# Altium PCB PCB1.PcbDoc
Units mil, origin at the board's own origin, x right, y up, seen from the top; angles counter-clockwise.
Board outline 6000 x 4000 mil, 2 copper layers (Top Layer, Bottom Layer); 73 components, 67 nets, 275 pads, 0 vias.
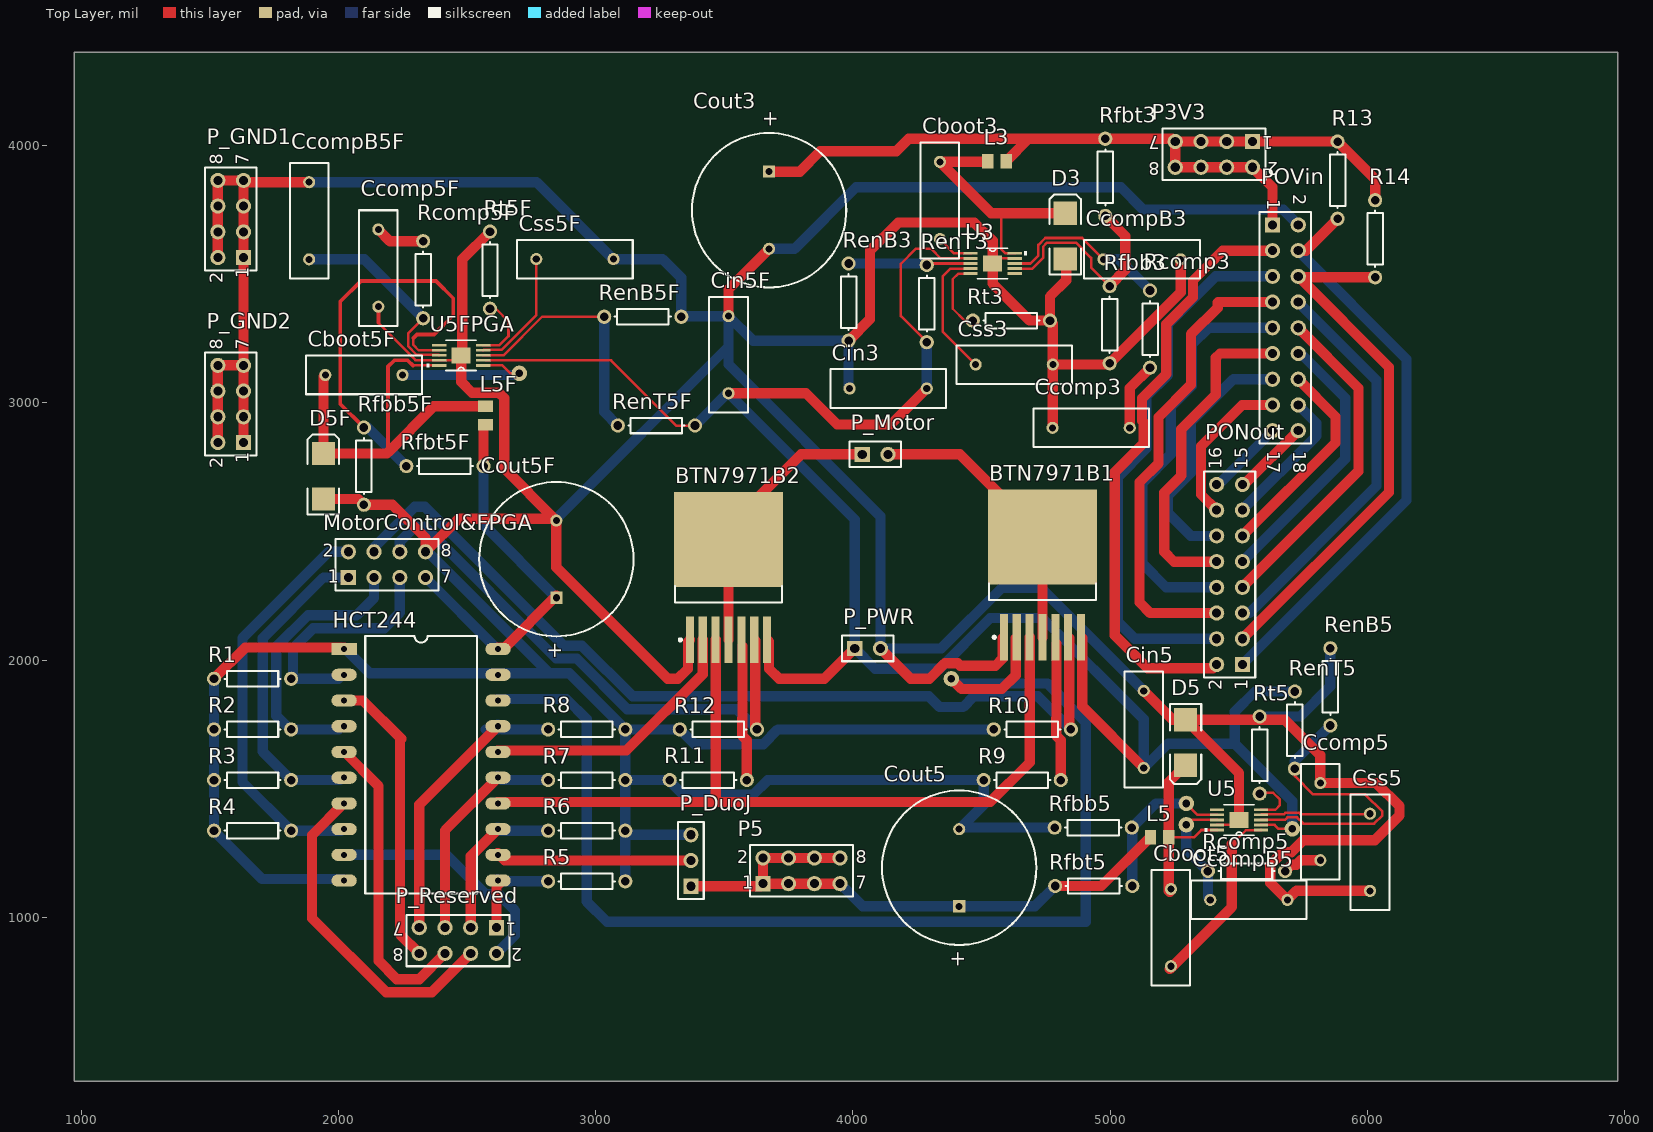
[diagram p0: Top Layer view]
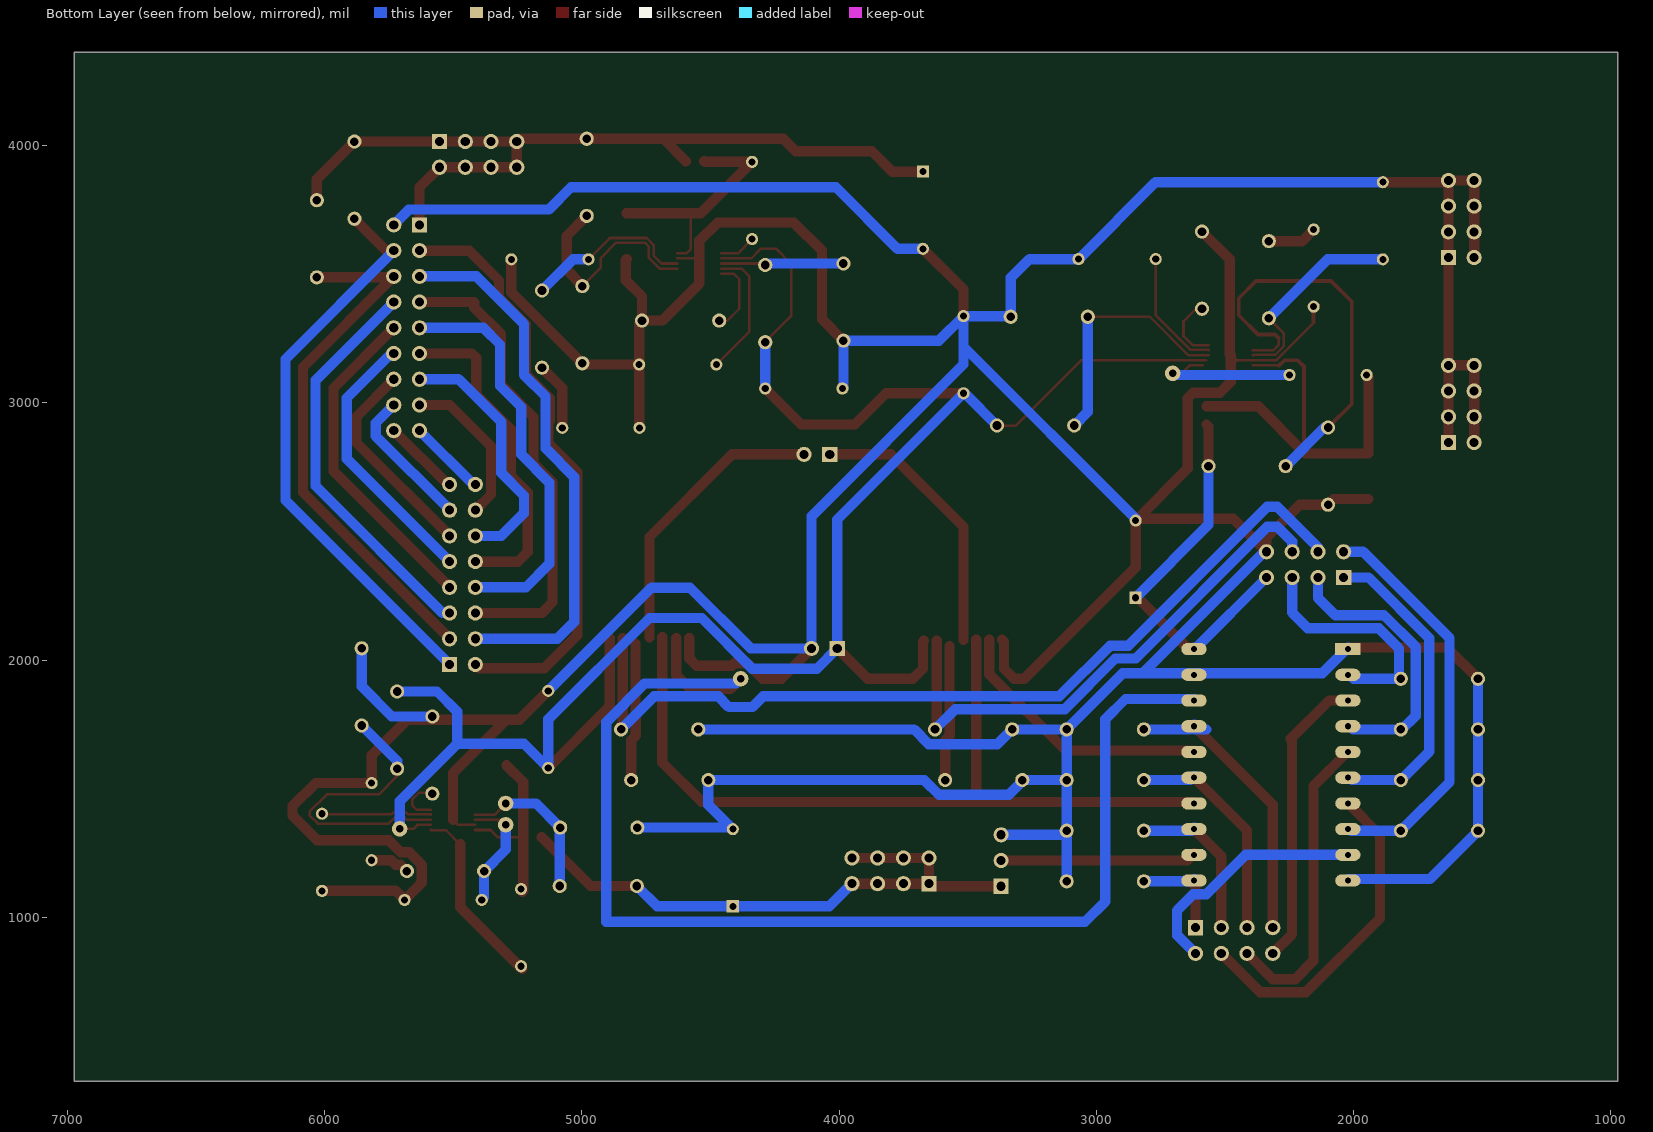
[diagram p1: Bottom Layer view, seen from below]

## Layer stack, top to bottom
Top Solder: solder mask 0.4, Solder Resist, Dk 3.5
Top Layer: signal copper 1.4
Dielectric 1: dielectric 12.6, FR-4, Dk 4.8
Bottom Layer: signal copper 1.4
Bottom Solder: solder mask 0.4, Solder Resist, Dk 3.5

## Board outline
973,363 6973,363 6973,4363 973,4363

## Design rules (kind name [scope] priority, off if disabled: settings)
Clearance [All] p1: gap=10 ignorepadtopadclearanceinfootprint=TRUE except(0: Arc-Hole Track-Hole SMDPad-Hole THPad-Hole Via-Hole Fill-Hole Poly-Hole Region-Hole Text-Hole; 5: Arc-SMDPad Track-SMDPad SMDPad-SMDPad; 8: Arc-Arc Arc-Track Track-Track)
PolygonConnect [All] p1: connectstyle=Relief reliefconductorwidth=10 reliefentries=4 polygonreliefangle="90 Angle" airgapwidth=10
RoutingVias [All] p1: holewidth=28 width=50 viastyle="Through Hole" minholewidth=28 minwidth=50 maxholewidth=28 maxwidth=50
SolderMaskExpansion [All] p1: expansion=4
Width [All] p1: maxlimit=150 minlimit=10 preferedwidth=40 minimp=50.000000 maximp=50.000000 favimp=50.000000
30 further rules are at their usual default settings.

## Components (designator, comment, footprint, x,y, rotation, side; value= is the part's Value field where it differs from the comment)
BTN7971B1 "BTN" BTN7971B 4736.78,2331.08 r90 top
BTN7971B2 "BTN" BTN7971B 3516.31,2321.24 r90 top
Cboot3 "Cap" RAD-0.3 4338,3787 r90 top value=100pF
Cboot5 "Cap" RAD-0.3 5236,960 r90 top value=100pF
Cboot5F "Cap" RAD-0.3 2098.98,3108.64 r180 top value=100pF
Ccomp3 "Cap" RAD-0.3 4926,2903 r180 top value=100pF
Ccomp5 "Cap" RAD-0.3 5817,1372 r90 top value=100pF
Ccomp5F "Cap" RAD-0.3 2155,3524 r270 top value=100pF
CcompB3 "Cap" RAD-0.3 5124,3558 r180 top value=100pF
CcompB5 "Cap" RAD-0.3 5539,1068 r180 top value=100pF
CcompB5F "Cap" RAD-0.3 1886,3708 r270 top value=100pF
Cin3 "Cap" RAD-0.3 4137,3056 r0 top value=100pF
Cin5 "Cap" RAD-0.3 5130.48,1730.68 r270 top value=100pF
Cin5F "Cap" RAD-0.3 3516.31,3187.38 r270 top value=100pF
Cout3 "Cap Pol1" RB7.6-15 3674,3749 r90 top value=100pF
Cout5 "Cap Pol1" RB7.6-15 4413,1193 r270 top value=100pF
Cout5F "Cap Pol1" RB7.6-15 2847.02,2392.5 r270 top value=100pF
Css3 "Cap" RAD-0.3 4627,3149 r180 top value=100pF
Css5 "Cap" RAD-0.3 6010,1253 r90 top value=100pF
Css5F "Cap" RAD-0.3 2919,3559 r180 top value=100pF
D3 "D Schottky" SMB 4825,3648.42 r90 top
D5 "D Schottky" SMB 5293,1680 r270 top
D5F "D Schottky" SMB 1941.5,2714.94 r90 top
HCT244 "HCT244" DIP20 2022,2043 r0 top
L3 "Inductor" 0805 4560,3940 r180 top value=10mH
L5 "Inductor" 0805 5192.5,1311 r0 top value=10mH
L5F "Inductor" 0805 2571.43,2951.16 r90 top value=10mH
MotorControl&FPGA "Header 4X2" HDR2X4 2038.35,2321.24 r0 top
P3V3 "Header 4X2" HDR2X4 5553,4016 r180 top
P5 "Header 4X2" HDR2X4 3650,1131 r0 top
P_DuoJ "Header 3" HDR1X3 3370,1121 r90 top
P_GND1 "Header 4X2" HDR2X4 1631,3565 r90 top
P_GND2 "Header 4X2" HDR2X4 1631,2846 r90 top
P_Motor "Header 2" HDR1X2 4036,2800 r0 top
P_PWR "Header 2" HDR1X2 4006.86,2045.65 r0 top
P_Reserved "Header 4X2" HDR2X4 2614,960 r180 top
PONout "Header 8X2" HDR2X8 5514,1983 r90 top
POVin "Header 9X2" HDR2X9 5631,3692 r270 top
R1 "Res1" AXIAL-0.3 1665.91,1927.54 r0 top value=1K
R2 "Res1" AXIAL-0.3 1665.91,1730.69 r0 top value=1K
R3 "Res1" AXIAL-0.3 1665.91,1533.83 r0 top value=1K
R4 "Res1" AXIAL-0.3 1665.91,1336.98 r0 top value=1K
R5 "Res1" AXIAL-0.3 2965.13,1140.13 r180 top value=1K
R6 "Res1" AXIAL-0.3 2965.13,1336.98 r180 top value=1K
R7 "Res1" AXIAL-0.3 2965.13,1533.83 r180 top value=1K
R8 "Res1" AXIAL-0.3 2965.13,1730.69 r180 top value=1K
R9 "Res1" AXIAL-0.3 4658.04,1533.83 r0 top value=1K
R10 "Res1" AXIAL-0.3 4697.41,1730.69 r180 top value=1K
R11 "Res1" AXIAL-0.3 3437.57,1533.83 r0 top value=1K
R12 "Res1" AXIAL-0.3 3476.94,1730.69 r180 top value=1K
R13 "Res1" AXIAL-0.3 5884,3866 r90 top value=1K
R14 "Res1" AXIAL-0.3 6030,3638 r90 top value=1K
Rcomp3 "Res1" AXIAL-0.3 5155,3287 r270 top value=1K
Rcomp5 "Res1" AXIAL-0.3 5530,1180 r0 top value=1K
Rcomp5F "Res1" AXIAL-0.3 2329,3479 r90 top value=1K
RenB3 "Res1" AXIAL-0.3 3983,3392 r90 top value=1K
RenB5 "Res1" AXIAL-0.3 5856,1896 r270 top value=1K
RenB5F "Res1" AXIAL-0.3 3183,3335 r180 top value=1K
RenT3 "Res1" AXIAL-0.3 4287,3386 r270 top value=1K
RenT5 "Res1" AXIAL-0.3 5718,1728 r90 top value=1K
RenT5F "Res1" AXIAL-0.3 3236,2912 r0 top value=1K
Rfbb3 "Res1" AXIAL-0.3 4998,3304 r90 top value=1K
Rfbb5 "Res1" AXIAL-0.3 4934,1349 r0 top value=1K
Rfbb5F "Res1" AXIAL-0.3 2098.98,2754.31 r90 top value=1K
Rfbt3 "Res1" AXIAL-0.3 4981,3877 r90 top value=1K
Rfbt5 "Res1" AXIAL-0.3 4936,1122 r180 top value=1K
Rfbt5F "Res1" AXIAL-0.3 2413.94,2754.31 r0 top value=1K
Rt3 "Res1" AXIAL-0.3 4616,3320 r180 top value=1K
Rt5 "Res1" AXIAL-0.3 5581,1631 r270 top value=1K
Rt5F "Res1" AXIAL-0.3 2589,3516 r270 top value=1K
U3 "TPS54160DGQR" S-PDSO-G10 4543,3542 r0 top value=Value
U5 "TPS54160DGQR" S-PDSO-G10 5501,1379 r180 top value=Value
U5FPGA "TPS54160DGQR" S-PDSO-G10 2477,3185 r180 top value=Value

## Footprints (in the part's own frame and the unit in brackets; to place one, negate y for a bottom-side part, rotate by r counter-clockwise, add the part's x,y. Pads: shape width x height; smd on the part's side, far side on the other; paste and mask are expansions set on the pad)
0805 [mil]
  rect 44x57 smd: 1(-35.5,0) 2(35.5,0)
AXIAL-0.3 [mm] "Axial Device, Thru-Hole; 2 Leads; 0.3 in Pin Spacing"
  round 1.4 hole 0.85: 1(-3.81,0) 2(3.81,0)
  silkscreen extent -2.77,-0.76 2.77,0.76
BTN7971B [mm]
  rect 4.6x0.8 smd: 1(-6.15,3.81) 2(-6.15,2.54) 3(-6.15,1.27) 4(-6.15,0) 5(-6.15,-1.27) 6(-6.15,-2.54) 7(-6.15,-3.81)
  rect 9.4x10.8 smd: 8(3.75,0)
  silkscreen extent -6.27,-5.3 -0.85,5.3
DIP20 [mm]
  rect 2.5x1.2 hole 0.6: 1(0,0)
  oval 2.5x1.2 hole 0.6: 2(0,-2.54) 3(0,-5.08) 4(0,-7.62) 5(0,-10.16) 6(0,-12.7) 7(0,-15.24) 8(0,-17.78) 9(0,-20.32) 10(0,-22.86) 11(15.2,-22.86) 12(15.2,-20.32) 13(15.2,-17.78) 14(15.2,-15.24) 15(15.2,-12.7) 16(15.2,-10.16) 17(15.2,-7.62) 18(15.2,-5.08) 19(15.2,-2.54) 20(15.2,0)
  silkscreen extent 2.08,-24.13 13.11,1.27
HDR1X2 [mm] "Connector; Header; 2 Position"
  rect 1.5x1.5 hole 0.9: 1(0,0)
  round 1.5 hole 0.9: 2(2.54,0)
  silkscreen extent -1.27,-1.27 3.81,1.27
HDR1X3 [mm] "Connector; Header; 3 Position"
  rect 1.5x1.5 hole 0.9: 1(0,0)
  round 1.5 hole 0.9: 2(2.54,0) 3(5.08,0)
  silkscreen extent -1.27,-1.27 6.35,1.27
HDR2X4 [mm] "Connector; Header; 4x2 Position"
  rect 1.5x1.5 hole 0.9: 1(0,0)
  round 1.5 hole 0.9: 2(0,2.54) 3(2.54,0) 4(2.54,2.54) 5(5.08,0) 6(5.08,2.54) 7(7.62,0) 8(7.62,2.54)
  silkscreen extent -1.27,-1.27 8.89,3.81
HDR2X8 [mm] "Connector; Header; 8x2 Position"
  rect 1.5x1.5 hole 0.9: 1(0,0)
  round 1.5 hole 0.9: 2(0,2.54) 3(2.54,0) 4(2.54,2.54) 5(5.08,0) 6(5.08,2.54) 7(7.62,0) 8(7.62,2.54) 9(10.16,0) 10(10.16,2.54) 11(12.7,0) 12(12.7,2.54) 13(15.24,0) 14(15.24,2.54) 15(17.78,0) 16(17.78,2.54)
  silkscreen extent -1.27,-1.27 19.05,3.81
HDR2X9 [mm] "Connector; Header; 9x2 Position"
  rect 1.5x1.5 hole 0.9: 1(0,0)
  round 1.5 hole 0.9: 2(0,2.54) 3(2.54,0) 4(2.54,2.54) 5(5.08,0) 6(5.08,2.54) 7(7.62,0) 8(7.62,2.54) 9(10.16,0) 10(10.16,2.54) 11(12.7,0) 12(12.7,2.54) 13(15.24,0) 14(15.24,2.54) 15(17.78,0) 16(17.78,2.54) 17(20.32,0) 18(20.32,2.54)
  silkscreen extent -1.27,-1.27 21.59,3.81
RAD-0.3 [mm] "Radial Cap, Thru-Hole; 2 Leads; 0.3 in Pin Spacing"
  round 1.2 hole 0.7: 1(-3.81,0) 2(3.81,0)
  silkscreen extent -5.71,-1.91 5.71,1.91
RB7.6-15 [mm] "Polarized Capacitor (Radial); 2 Leads"
  rect 1.2x1.2 hole 0.7: 1(3.81,0)
  round 1.2 hole 0.7: 2(-3.81,0)
  silkscreen extent -7.62,-7.62 7.62,7.62
S-PDSO-G10 [mm]
  rect 1.411x0.27 smd: 1(-2.175,1) 2(-2.175,0.5) 3(-2.175,0) 4(-2.175,-0.5) 5(-2.175,-1) 6(2.175,-1) 7(2.175,-0.5) 8(2.175,0) 9(2.175,0.5) 10(2.175,1)
  rect 1.88x1.57 smd paste-0.927: 11(0,0)
  silkscreen extent -1.5,-1.5 3.39,1.5
SMB [mm] "DO-214-AA/SMB; 2 C-Bend Leads; Body 5.3 x 3.6 mm, inc. leads (LxW)"
  rect 2.3x2.3 smd: 1(-2.25,0) 2(2.25,0)
  silkscreen extent -3.8,-1.55 4.1,1.55

## Part data
Cboot3 Cboot5 Cboot5F Ccomp3 Ccomp5 Ccomp5F CcompB3 CcompB5 CcompB5F Cin3 Cin5 Cin5F Css3 Css5 Css5F: "Capacitor", LatestRevisionDate=17-Jul-2002, LatestRevisionNote="Re-released for DXP Platform.", PackageDescription="Radial Cap, Thru-Hole; 2 Leads; 0.3 in Pin Spacing", PackageReference=RAD-0.3, Published=8-Jun-2000, Publisher="Altium Limited"
Cout3 Cout5 Cout5F: "Polarized Capacitor (Radial)", LatestRevisionDate=17-Jul-2002, LatestRevisionNote="Re-released for DXP Platform.", PackageDescription="Polarized Capacitor (Radial); 2 Leads", PackageReference=RB7.6-15, Published=8-Jun-2000, Publisher="Altium Limited"
D3 D5 D5F: "Schottky Diode", Code_JEDEC=DO-214-AA, LatestRevisionDate=17-Jul-2002, LatestRevisionNote="Re-released for DXP Platform.", PackageDescription="DO-214-AA/SMB; 2 C-Bend Leads; Body 5.3 x 3.6 mm, inc. leads (LxW)", PackageReference=SMB, Published=8-Jun-2000, Publisher="Altium Limited"
MotorControl&FPGA P3V3 P5 P_GND1 P_GND2 P_Reserved: "Header, 4-Pin, Dual row", LatestRevisionDate=17-Jul-2002, LatestRevisionNote="Re-released for DXP Platform.", Publisher="Altium Limited"
P_DuoJ: "Header, 3-Pin", LatestRevisionDate=17-Jul-2002, LatestRevisionNote="Re-released for DXP Platform.", Publisher="Altium Limited"
P_Motor P_PWR: "Header, 2-Pin", LatestRevisionDate=17-Jul-2002, LatestRevisionNote="Re-released for DXP Platform.", Publisher="Altium Limited"
PONout: "Header, 8-Pin, Dual row", LatestRevisionDate=17-Jul-2002, LatestRevisionNote="Re-released for DXP Platform.", Publisher="Altium Limited"
POVin: "Header, 9-Pin, Dual row", LatestRevisionDate=17-Jul-2002, LatestRevisionNote="Re-released for DXP Platform.", Publisher="Altium Limited"
R1 R2 R3 R4 R5 R6 R7 R8 R9 R10 R11 R12 R13 R14 Rcomp3 Rcomp5 Rcomp5F RenB3 RenB5 RenB5F RenT3 RenT5 RenT5F Rfbb3 Rfbb5 Rfbb5F Rfbt3 Rfbt5 Rfbt5F Rt3 Rt5 Rt5F: "Resistor", LatestRevisionDate=17-Jul-2002, LatestRevisionNote="Re-released for DXP Platform.", PackageDescription="Axial Device, Thru-Hole; 2 Leads; 0.3 in Pin Spacing", PackageReference=AXIAL-0.3, Published=8-Jun-2000, Publisher="Altium Limited"
U3 U5 U5FPGA: "Imported", Manufacturer_Name="Texas Instruments", Manufacturer_Part_Number=TPS54140DGQR, RefDes=RefDes, TYPE=TYPE, Vendor="Texas Instruments"
L3 L5 L5F: Code_IEC=1005, Code_JEITA=0402, LatestRevisionDate=29-May-2009, LatestRevisionNote="IPC-7351 Footprint Added.", PackageDescription="Chip Inductor", PackageReference=0402-A, Published=8-Jun-2000, Publisher="Altium Limited"

## Free pads (board coordinates)
  round 60 hole 30: 2(4382.45,1927.54) 3(2703,3115) 5(5296,1443) 6(5708,1344) 7(5296,1360)

## Nets (pads, with @x,y where several pads share a name; then routed paths per layer and width w, separated by ;. In a path a pad name is that pad's centre, name@x,y a point inside that pad or via, vN(x,y) a via of type N, cw(c..) or ccw(c..) an arc to the next point about the centre after c; other vN are vias at no path point)
3V3: Cout3.1 L3.1 P3V3.1 P3V3.2 P3V3.3 P3V3.4 P3V3.5 P3V3.6 P3V3.7 P3V3.8 POVin.1 R13.2 R14.2 Rfbt3.2 | length 3335.4
  Top Layer w40: Cout3.1 3793,3899 3872,3978 4168,3978 4217,4027 4682.5,4027 ; L3.1 4682.5,4027 ; POVin.1 5631,3838 P3V3.2 P3V3.4 P3V3.6 P3V3.8 P3V3.7 ; R14.2 6030,3870 R13.2 P3V3.1 P3V3.3 P3V3.5 P3V3.7 ; 4682.5,4027 Rfbt3.2 5242,4027 P3V3.7
+5: Cout5.1 L5.1 P5.1 P5.2 P5.3 P5.4 P5.5 P5.6 P5.7 P5.8 P_DuoJ.1 Rfbt5.2 | length 2339.5
  Top Layer w40: P_DuoJ.1 3640,1121 P5.1 ; P5.7 P5.5 P5.3 P5.1 ; P5.8 P5.6 P5.4 P5.2 P5.1 ; Rfbt5.2 4965.78,1122 5155.89,1312.11 L5.1
  Bottom Layer w40: P5.7 4038,1043 Cout5.1 4707,1043 Rfbt5.2
+5FPGA: Cout5F.1 HCT244.20 L5F.1 MotorControl&FPGA.7 Rfbt5F.2 | length 1498.4
  Top Layer w40: Rfbt5F.2 2563.94,2908.18 L5F.1 ; HCT244.20@2618.67,2048.8 2645.84,2048.8 Cout5F.1@2847.02,2249.98
  Bottom Layer w40: MotorControl&FPGA.7 2610.8,2048.8 HCT244.20@2618.67,2048.8 ; Rfbt5F.2 2563.94,2525.57 Cout5F.1
GND: BTN7971B1.1 BTN7971B2.1 Ccomp3.2 Ccomp5.2 Ccomp5F.2 CcompB3.1 CcompB5.1 CcompB5F.1 Cin3.1 Cin5.1 Cin5F.1 Cout3.2 Cout5.2 Cout5F.2 Css3.1 Css5.1 Css5F.1 D3.1 D5.1 D5F.1 HCT244.1 HCT244.10 HCT244.19 MotorControl&FPGA.8 P_DuoJ.3 P_GND1.1 P_GND1.2 P_GND1.3 P_GND1.4 P_GND1.5 P_GND1.6 P_GND1.7 P_GND1.8 P_GND2.1 P_GND2.2 P_GND2.3 P_GND2.4 P_GND2.5 P_GND2.6 P_GND2.7 P_GND2.8 P_PWR.2 POVin.2 R1.1 R2.1 R3.1 R4.1 R5.1 R6.1 R7.1 R8.1 R9.1 R10.2 R11.1 R12.2 RenB3.1 RenB5.1 RenB5F.1 Rfbb3.1 Rfbb5.1 Rfbb5F.1 Rt3.1 Rt5.1 Rt5F.1 U3.9 U3.11 U5.9 U5.11 U5FPGA.9 U5FPGA.11 | length 29882.7
  Top Layer w10: 2155,3312.53 2155,3310.46 2299.25,3166.21 2301.32,3166.21 2301.32,3165.32 U5FPGA.9 U5FPGA.11@2457.32,3165.32 ; U3.11 4562.68,3561.68 U3.9 ; U5.9 5481.32,1359.32 U5.11
  Top Layer w15: 2155,3312.53 Ccomp5F.2 ; U5FPGA.11@2457.32,3165.32 U5FPGA.11
  Top Layer w40: R1.1 1637.17,2048.8 HCT244.1@2020.24,2048.8 ; P_GND2.2 P_GND2.4 P_GND2.6 P_GND2.8 P_GND2.7 ; P_GND1.2 P_GND1.4 P_GND1.6 P_GND1.8 P_GND1.7 ; P_GND2.1 P_GND2.3 P_GND2.5 P_GND2.7 ; CcompB5F.1 1638,3858 P_GND1.7 ; D5F.1 2076.94,2626.36 Rfbb5F.1 2209.61,2604.31 2338.35,2475.57 MotorControl&FPGA.8 2467.09,2549.98 Cout5F.2@2839.54,2549.98 ; Rt5F.1 2481.5,3558.5 2481.5,3189.5 U5FPGA.11 2477,3082 2519,3040 2623,3040 2644,3019 2644,2745.51 Cout5F.2@2839.54,2549.98 ; BTN7971B2.1 3358.83,2071.63 3358.83,1966.91 3319.46,1927.54 3280.09,1927.54 2847.02,2360.61 Cout5F.2 Cout5F.2@2839.54,2549.98 ; Cin5F.1 3516.31,3441.31 Cout3.2 ; RenB3.1 4066,3325 4066,3591 4176,3701 4472,3701 4543,3630 U3.11 4543,3464 4687,3320 Rt3.1 ; P_PWR.2 4224.97,1927.54 4297.6,1927.54 4357.6,1987.54 4407.3,1987.54 4416.44,1978.4 4554.24,1978.4 4582.53,2006.69 BTN7971B1.1@4582.53,2084.7 ; Ccomp3.2 4777,2904 Css3.1 ; D3.1 4829,3555.84 4829,3477 4766,3414 Rt3.1 ; Cin5.1 5242.58,1768.58 D5.1 ; CcompB3.1 5274,3430 Rfbb3.1 4993,3149 Css3.1 ; U5.11 5501,1560.58 D5.1 ; Css5.1 5724,1103 CcompB5.1 5622,1135 5622,1204 5671,1253 5703.66,1253 5750.66,1300 6028,1300 6125,1397 6125,1432 6035,1522 Ccomp5.2 5817,1630 5678.42,1768.58 D5.1 ; P_GND2.7 P_GND1.1 P_GND1.3 P_GND1.5 P_GND1.7 ; Rt3.1 4777,3309 Css3.1
  Bottom Layer w40: R1.1 R2.1 R3.1 R4.1 1704.1,1148.8 HCT244.10@2020.24,1148.8 ; CcompB5F.1 2770,3858 Css5F.1 3260,3559 3333,3486 RenB5F.1 3335.38,3337.38 Cin5F.1 ; HCT244.1@2020.24,2048.8 2021.67,2048.8 2121.67,1948.8 2820.09,1948.8 ; MotorControl&FPGA.8 2347.65,2421.24 2820.09,1948.8 ; Cout5F.2@2847.02,2549.98 3516.31,3219.27 ; R5.1 R6.1 ; P_DuoJ.3 3131.11,1321 R6.1 ; Cout3.2 3773,3599 4012,3838 5042,3838 5128.47,3751.53 5673.47,3751.53 POVin.2@5728,3697 ; Cin3.1 3983,3060 RenB3.1 3611.69,3242 Cin5F.1 ; Cout5.2 Cout5.2@4419,1349 ; R10.2 3708.34,1730.69 3650.78,1673.13 3384.5,1673.13 R12.2 R8.1 ; Rfbb5.1 Cout5.2@4419,1349 ; Cin5.1 4729.3,2281.87 4579.3,2281.87 4343.08,2045.65 P_PWR.2 4106.86,2559.14 3516.31,3149.69 3516.31,3219.27 ; Rt5.1 5739,1781 5856,1898 RenB5.1 ; 2820.09,1948.8 2897.02,1948.8 R8.1 ; R6.1 R7.1 ; R7.1 R8.1 ; R7.1 R11.1 3287.57,1529.35 3340.64,1476.28 3611.41,1476.28 3668.97,1533.83 R9.1 4508.04,1438.04 Cout5.2@4419,1349 ; 3516.31,3219.27 Cin5F.1
NetBTN7971B1_2: BTN7971B1.2 HCT244.18 pad.2 | length 4860.8
  Top Layer w40: pad.2 4421.82,1888.17 4579.3,1888.17 4632.53,1941.39 BTN7971B1.2@4632.53,2084.7
  Bottom Layer w40: HCT244.18@2618.67,1848.8 2886.39,1848.8 2965.13,1770.06 2965.13,1061.39 3043.87,982.65 4904.97,982.65 4904.97,1706.84 4904.97,1759.35 4754.89,1909.43 4400.56,1909.43 pad.2
NetBTN7971B1_3: BTN7971B1.3 BTN7971B2.3 HCT244.14 | length 3253.3
  Top Layer w40: HCT244.14@2618.67,1448.8 3476.94,1448.8 ; BTN7971B2.3 3466.31,1459.43 3476.94,1448.8 ; BTN7971B1.3 4686.78,1601.94 4533.63,1448.8 3476.94,1448.8
NetBTN7971B1_4: BTN7971B1.4 BTN7971B1.8 P_Motor.2 | length 1123.6
  Top Layer w40: P_Motor.2 4415.5,2800 BTN7971B1.8 BTN7971B1.4
NetBTN7971B1_5: BTN7971B1.5 R9.2 | length 538.2
  Top Layer w40: BTN7971B1.5@4791.03,2063.99 4791.03,1773.9 4789.85,1772.72 4789.85,1706.84 4808.04,1688.65 R9.2
NetBTN7971B1_6: BTN7971B1.6 MotorControl&FPGA.4 R10.1 | length 3542.5
  Top Layer w40: BTN7971B1.6@4841.03,2084.7 4841.03,1737.06 R10.1
  Bottom Layer w40: MotorControl&FPGA.4 2138.35,2439.35 2295.83,2596.83 2335.2,2596.83 2875.76,2056.28 2946.47,2056.28 3143.32,1859.43 4295,1859.43 4336.89,1817.54 4428.01,1817.54 4469.9,1859.43 4718.67,1859.43 R10.1
NetBTN7971B2_2: BTN7971B2.2 HCT244.16 | length 1054.1
  Top Layer w40: HCT244.16@2618.67,1648.8 3119.46,1648.8 3416.31,1945.65 BTN7971B2.2
NetBTN7971B2_4: BTN7971B2.4 BTN7971B2.8 P_Motor.1 | length 1075.4
  Top Layer w40: BTN7971B2.4 BTN7971B2.8 3516.31,2518.09 3798.22,2800 P_Motor.1
NetBTN7971B2_5: BTN7971B2.5 R11.2 | length 528.3
  Top Layer w40: BTN7971B2.5@3570.56,2054.15 3570.56,1773.9 3569.38,1772.72 3569.38,1706.84 3587.57,1688.65 R11.2
NetBTN7971B2_6: BTN7971B2.6 MotorControl&FPGA.6 R12.1 | length 2124.7
  Top Layer w40: BTN7971B2.6@3620.56,2074.86 3620.56,1737.06 R12.1
  Bottom Layer w40: MotorControl&FPGA.6 2238.35,2460.61 2295.83,2518.09 2335.2,2518.09 2847.02,2006.28 2925.76,2006.28 3122.61,1809.43 3548.2,1809.43 R12.1
NetCboot3_1: Cboot3.1 U3.1 | length 142.4
  Top Layer w10: Cboot3.1 4393.63,3581.37 U3.1
NetCboot3_2: Cboot3.2 D3.2 L3.2 U3.10 | length 956.1
  Top Layer w10: 4576,3737 4576,3598 4592.63,3581.37 U3.10
  Top Layer w40: L3.2 4521.5,3937 Cboot3.2 4538,3737 4576,3737 D3.2
NetCboot5_1: Cboot5.1 U5.1 | length 722.4
  Top Layer w10: 5473,1284 5527.09,1338.09 5586.63,1338.09 U5.1
  Top Layer w40: Cboot5.1@5232,799 5473,1040 5473,1284
NetCboot5_2: Cboot5.2 D5.2 L5.2 U5.10 | length 720.2
  Top Layer w10: L5.2 5326,1311 5354.63,1339.63 U5.10
  Top Layer w40: Cboot5.2@5232,1099 5228,1103 L5.2 5228,1526.42 D5.2
NetCboot5F_1: Cboot5F.1 pad.3 U5FPGA.1 | length 585.9
  Top Layer w10: U5FPGA.1@2586.45,3145.63 2637.37,3145.63 2668,3115 pad.3
  Bottom Layer w40: Cboot5F.1 2696.64,3108.64 pad.3
NetCboot5F_2: Cboot5F.2 D5F.2 L5F.2 U5FPGA.10 | length 1563.2
  Top Layer w10: 2289.37,3145.63 U5FPGA.10
  Top Layer w15: 2187.57,2803.52 2193,2808.95 2193,3141 2218,3166 2269,3166 2289.37,3145.63
  Top Layer w40: Cboot5F.2 1941.5,3101.16 D5F.2 2187.57,2803.52 ; 2193,2808.95 2370.7,2986.66 L5F.2
NetCcomp3_1: Ccomp3.1 Rcomp3.2 | length 266.7
  Top Layer w40: Ccomp3.1 5076,3058 Rcomp3.2
NetCcomp5_1: Ccomp5.1 Rcomp5.2 | length 154.4
  Top Layer w40: Rcomp5.2 5705,1205 5723.54,1205 5740.54,1222 Ccomp5.1
NetCcomp5F_1: Ccomp5F.1 Rcomp5F.2 | length 192.6
  Top Layer w40: Ccomp5F.1 2200,3629 Rcomp5F.2
NetCcompB3_2: CcompB3.2 Rcomp3.1 U3.8 | length 676.2
  Top Layer w10: U3.8 4690,3542 4721,3573 4721,3614.46 4747.54,3641 4891,3641 CcompB3.2
  Bottom Layer w40: CcompB3.2 5034,3558 Rcomp3.1
NetCcompB5_2: CcompB5.2 pad.7 Rcomp5.1 U5.8 | length 457.8
  Top Layer w10: pad.7 5315,1379 U5.8
  Bottom Layer w40: pad.7 5296,1264 Rcomp5.1 5380,1077 CcompB5.2
NetCcompB5F_2: CcompB5F.2 Rcomp5F.1 U5FPGA.8 | length 806.2
  Top Layer w10: Rcomp5F.1 2270.5,3270.5 2270.5,3220.42 2304.23,3186.69 2389.68,3186.69 U5FPGA.8
  Bottom Layer w40: CcompB5F.2 2100,3558 Rcomp5F.1
NetCss3_2: Css3.2 U3.4 | length 516.9
  Top Layer w10: U3.4 4379.31,3522.31 4349,3492 4349,3277 Css3.2
NetCss5_2: Css5.2 U5.4 | length 430.6
  Top Layer w10: U5.4 5588.31,1400.37 5675.27,1400.37 5681.9,1407 5734.1,1407 5740.73,1400.37 6007.37,1400.37 Css5.2
NetCss5F_2: Css5F.2 U5FPGA.4 | length 480.1
  Top Layer w10: U5FPGA.4 2564.31,3206.37 2633.09,3206.37 2769,3342.28 Css5F.2
NetHCT244_2: HCT244.2 MotorControl&FPGA.5 R1.2 | length 913.2
  Bottom Layer w40: HCT244.2@1998.98,1927.54 R1.2 1823.39,1935.01 1823.39,2045.65 1902.13,2124.39 2177.72,2124.39 2238.35,2185.02 MotorControl&FPGA.5
NetHCT244_3: HCT244.3 P_Reserved.8 | length 1150.9
  Top Layer w40: HCT244.3 2095,1843 2244,1694 2239,1689 2239,935 P_Reserved.8
NetHCT244_4: HCT244.4 MotorControl&FPGA.3 R2.2 | length 1071.2
  Bottom Layer w40: HCT244.4@2002.13,1730.69 R2.2 1811.43,1730.69 1758.36,1783.76 1758.36,2051.32 1881.42,2174.39 2070.24,2174.39 2138.35,2242.5 MotorControl&FPGA.3
NetHCT244_5: HCT244.5 P_Reserved.6 | length 1197.2
  Top Layer w40: HCT244.5 2023.42,1643 2156,1510.42 2156,831 2227,760 2314,760 P_Reserved.6
NetHCT244_6: HCT244.6 MotorControl&FPGA.1 R3.2 | length 1217.3
  Bottom Layer w40: HCT244.6@2005.28,1533.84 R3.2 1705.28,1644.47 1705.28,2085.02 1941.5,2321.24 MotorControl&FPGA.1
NetHCT244_7: HCT244.7 P_Reserved.4 | length 1297.5
  Top Layer w40: HCT244.7 2020.58,1443 1897,1319.42 1897,997 2185,709 2363,709 P_Reserved.4
NetHCT244_8: HCT244.8 MotorControl&FPGA.2 R4.2 | length 1570.1
  Bottom Layer w40: HCT244.8@2008.43,1336.98 R4.2 1626.54,1526.35 1626.54,2085.02 1962.76,2421.24 MotorControl&FPGA.2
NetHCT244_9: HCT244.9 P_Reserved.2 | length 951.2
  Bottom Layer w40: HCT244.9 2419,1243 2572.62,1089.38 2623.62,1089.38 2686,1027 2686,930.52 2615.48,860 P_Reserved.2
NetHCT244_11: HCT244.11 P_Reserved.1 R5.2 | length 411.5
  Top Layer w40: P_Reserved.1 2614,1136.57 HCT244.11 HCT244.11@2630,1133.43
  Bottom Layer w40: R5.2 HCT244.11@2627.33,1140.13 ; HCT244.11@2622.45,1145.02 HCT244.11@2627.33,1140.13 ; HCT244.11@2622.45,1145.02 2618.67,1148.8 HCT244.11@2622.45,1145.02 ; HCT244.11@2622.45,1145.02 HCT244.11@2627.33,1140.13
NetHCT244_12: HCT244.12 P_DuoJ.2 | length 762.8
  Top Layer w40: HCT244.12@2618.67,1248.8 2646.47,1221 P_DuoJ.2
NetHCT244_13: HCT244.13 P_Reserved.3 R6.2 | length 630.7
  Top Layer w40: P_Reserved.3 2514,1238 2619,1343 HCT244.13
  Bottom Layer w40: HCT244.13@2617.25,1348.8 2618.67,1348.8 2623.95,1343.52 2624.68,1342.78 2630.48,1336.98 R6.2
NetHCT244_15: HCT244.15 P_Reserved.5 R7.2 | length 873.4
  Top Layer w40: P_Reserved.5 2414,1338 2619,1543 HCT244.15
  Bottom Layer w40: HCT244.15@2617.25,1548.8 2618.67,1548.8 2633.63,1533.84 R7.2
NetHCT244_17: HCT244.17 P_Reserved.7 R8.2 | length 1180.1
  Top Layer w40: P_Reserved.7 2314,1438 2619,1743 HCT244.17
  Bottom Layer w40: 2571.43,1730.69 2618.67,1730.69 2618.67,1748.8 2636.78,1730.69 R8.2
NetPONout_1: PONout.1 POVin.4 R13.1 | length 2252
  Top Layer w40: POVin.4 5760,3592 R13.1
  Bottom Layer w40: PONout.1 6152,2621 6152,3170 5731,3591 POVin.4
NetPONout_2: PONout.2 POVin.3 | length 2322.9
  Top Layer w40: PONout.2 5399,1968 5146,1968 5018,2096 5018,2731 5129.62,2842.62 5129.62,2925.21 5124,2930.83 5124,3018 5218,3112 5218,3306.12 5322,3410.12 5322,3476 5438,3592 POVin.3
NetPONout_3: PONout.3 POVin.6 R14.1 | length 2086.3
  Top Layer w40: PONout.3 6084,2653 6084,3139 POVin.6@5735,3488 ; POVin.6 POVin.6@5735,3488 ; R14.1 POVin.6@5735,3488
NetPONout_4: PONout.4 POVin.5 | length 2134.2
  Bottom Layer w40: PONout.4 5095,2083 5029,2149 5029,2711 5141,2823 5141,3025 5225,3109 5225,3307 5410,3492 POVin.5
NetPONout_5: PONout.5 POVin.8 | length 1566.5
  Bottom Layer w40: PONout.5 5541,2183 6035,2677 6035,3088 POVin.8
NetPONout_6: PONout.6 POVin.7 | length 1822.3
  Top Layer w40: PONout.6 5156,2183 5114,2225 5114,2691.24 5188,2765.24 5188,2945.12 5314,3071.12 5314,3266.35 5418,3370.35 5418,3390.24 5419.76,3392 POVin.7
NetPONout_7: PONout.7 POVin.10 | length 1292.7
  Top Layer w40: PONout.7 5965,2734 5965,3058 POVin.10
NetPONout_8: PONout.8 POVin.9 | length 1598.1
  Bottom Layer w40: PONout.8 5217,2283 5126,2374 5126,2690 5236,2800 5236,2984 5318,3066 5318,3227 5383,3292 POVin.9
NetPONout_9: PONout.9 POVin.12 | length 1056.3
  Bottom Layer w40: PONout.9 5914,2783 5914,3019 5741,3192 POVin.12
NetPONout_10: PONout.10 POVin.11 | length 1284.6
  Top Layer w40: PONout.10 5248,2383 5210,2421 5210,2651.47 5276,2717.47 5276,2897.35 5410,3031.35 5410,3175 5427,3192 POVin.11
NetPONout_11: PONout.11 POVin.14 | length 819
  Top Layer w40: PONout.11 5876,2845 5876,2947 POVin.14
NetPONout_12: PONout.12 POVin.13 | length 1003.7
  Bottom Layer w40: PONout.12 5313,2483 5225,2571 5225,2640 5313,2728 5313,2926 5479,3092 POVin.13
NetPONout_13: PONout.13 POVin.16 | length 556.9
  Bottom Layer w40: PONout.13 5514,2584 5801,2871 5801,2922 POVin.16
NetPONout_14: PONout.14 POVin.15 | length 618.5
  Top Layer w40: PONout.14 5353,2644 5353,2832 5513,2992 POVin.15
NetPONout_15: PONout.15 POVin.18 | length 303.6
  Top Layer w40: PONout.15 5522,2683 POVin.18
NetPONout_16: PONout.16 POVin.17 | length 303.6
  Bottom Layer w40: PONout.16 5422,2683 POVin.17
NetRenB3_2: RenB3.2 RenT3.1 U3.3 | length 479.3
  Top Layer w10: RenT3.1 4293,3542 U3.3
  Bottom Layer w40: RenB3.2 4281,3542 RenT3.1
NetRenB5_2: RenB5.2 RenT5.1 U5.3 | length 1164.9
  Top Layer w10: U5.3 5679.36,1379 5689.36,1389 5726.64,1389 5751.26,1364.38 6026,1364.38 6058,1396.38 6058,1411 5991,1478 5789,1478 5718,1549 RenT5.1
  Bottom Layer w40: RenT5.1 5718,1608 RenB5.2
NetRenB5F_2: RenB5F.2 RenT5F.1 U5FPGA.3 | length 977.5
  Top Layer w10: U5FPGA.3 2642,3185 2792,3335 RenB5F.2
  Bottom Layer w40: RenB5F.2 3033,2965 RenT5F.1
NetRfbb3_2: Rfbb3.2 Rfbt3.1 U3.7 | length 859.1
  Top Layer w10: U3.7 4697.31,3522.31 4739,3564 4739,3607 4755,3623 4867,3623 4926,3564 4926,3526 Rfbb3.2
  Top Layer w40: Rfbt3.1 5059,3649 5059,3517 4998,3456 Rfbb3.2
NetRfbb5_2: pad.5 Rfbb5.2 Rfbt5.1 U5.7 | length 616.5
  Top Layer w10: pad.5 5340.31,1398.69 U5.7
  Bottom Layer w40: Rfbt5.1 5086,1347 Rfbb5.2 5178,1443 pad.5
NetRfbb5F_2: Rfbb5F.2 Rfbt5F.1 U5FPGA.7 | length 1648.2
  Top Layer w10: 2291,3252 2291,3225.37 2311.69,3204.69 U5FPGA.7
  Top Layer w15: Rfbb5F.2 2007,2996.29 2007,3394 2087,3474 2379,3474 2446,3407 2446,3341 2371,3266 2305,3266 2291,3252
  Bottom Layer w40: Rfbb5F.2 2113.94,2904.31 Rfbt5F.1
NetRt3_2: Rt3.2 U3.5 | length 290.4
  Top Layer w10: U3.5 4409.63,3502.63 4388,3481 4388,3366 4434,3320 Rt3.2
NetRt5_2: Rt5.2 U5.5 | length 193.7
  Top Layer w10: Rt5.2 5584,1484 5634,1484 5660,1458 5660,1436 5642.37,1418.37 U5.5
NetRt5F_2: Rt5F.2 U5FPGA.5 | length 262.6
  Top Layer w10: U5FPGA.5 2625.63,3224.37 2661,3259.74 2661,3317 2612,3366 Rt5F.2
VCC: BTN7971B1.7 BTN7971B2.7 Cin3.2 Cin5.2 Cin5F.2 P_PWR.1 pad.6 RenT3.2 RenT5.2 RenT5F.2 U3.2 U5.2 U5FPGA.2 | length 8048.2
  Top Layer w10: U5FPGA.2@2571.94,3165.32 3059.68,3165.32 3313,2912 RenT5F.2 ; RenT3.2 4186,3337 4186,3541 4243.5,3598.5 4304.5,3598.5 4341.32,3561.68 U3.2 ; U5.2 5639.68,1359.32 5655,1344 pad.6
  Top Layer w40: Cin5F.2 3817.62,3037.38 3939,2916 4147,2916 Cin3.2 ; BTN7971B2.7@3670.56,2074.86 3673.79,2071.63 3673.79,1966.91 3713.16,1927.54 3888.75,1927.54 P_PWR.1 ; BTN7971B1.7@4891.03,2084.7 4891.03,1820.13 Cin5.2
  Bottom Layer w40: RenT5F.2 3511.38,3037.38 Cin5F.2 4006.86,2546.83 P_PWR.1 4085.6,1966.91 4336.97,1966.91 4533.82,2163.76 4736.78,2163.76 5130.48,1770.06 Cin5.2 5224.79,1675 5484,1675 ; Cin3.2 RenT3.2 ; pad.6 5708,1451 5484,1675 ; RenT5.2 5563,1878 5484,1799 5484,1675
pads on no net: U3.6 U5.6 U5FPGA.6

## Text inside footprints (layer, text, board x,y; h text height)
Cout3: Top Overlay "+" at 3703.01,4069.15 h59.06 r90
Cout5: Top Overlay "+" at 4383.99,872.85 h59.06 r270
Cout5F: Top Overlay "+" at 2818.01,2072.34 h59.06 r270
MotorControl&FPGA: Top Overlay "2" at 1938.35,2401.24 h50; Top Overlay "1" at 1958.35,2301.24 h50; Top Overlay "7" at 2398.35,2301.24 h50; Top Overlay "8" at 2398.35,2401.24 h50
P3V3: Top Overlay "2" at 5653,3936 h50 r180; Top Overlay "1" at 5633,4036 h50 r180; Top Overlay "7" at 5193,4036 h50 r180; Top Overlay "8" at 5193,3936 h50 r180
P5: Top Overlay "2" at 3550,1211 h50; Top Overlay "1" at 3570,1111 h50; Top Overlay "7" at 4010,1111 h50; Top Overlay "8" at 4010,1211 h50
P_GND1: Top Overlay "2" at 1551,3465 h50 r90; Top Overlay "1" at 1651,3485 h50 r90; Top Overlay "7" at 1651,3925 h50 r90; Top Overlay "8" at 1551,3925 h50 r90
P_GND2: Top Overlay "2" at 1551,2746 h50 r90; Top Overlay "1" at 1651,2766 h50 r90; Top Overlay "7" at 1651,3206 h50 r90; Top Overlay "8" at 1551,3206 h50 r90
P_Reserved: Top Overlay "2" at 2714,880 h50 r180; Top Overlay "1" at 2694,980 h50 r180; Top Overlay "7" at 2254,980 h50 r180; Top Overlay "8" at 2254,880 h50 r180
PONout: Top Overlay "2" at 5434,1883 h50 r90; Top Overlay "1" at 5534,1883 h50 r90; Top Overlay "15" at 5534,2743 h50 r90; Top Overlay "16" at 5434,2743 h50 r90
POVin: Top Overlay "18" at 5711,2812 h50 r270; Top Overlay "17" at 5611,2812 h50 r270; Top Overlay "1" at 5611,3792 h50 r270; Top Overlay "2" at 5711,3812 h50 r270